# EAGLE board pk4017 (EAGLE 7.7.0)

Size 56.18 x 74.92 mm. Coordinates in mm from the lower left corner, seen from the top.
Outline: 0,0 56.18,0 56.18,74.92 0,74.92 0,0
Copper layers (1*16): Top 0.035mm / dielectric 1.5mm / Bottom 0.035mm
Design rules "default": minimum track width 10mil, minimum drill 24mil, track to track 8mil, track to pad 8mil, pad to pad 8mil, via to via 8mil, smd to smd 8mil, copper to edge 40mil, drill to drill 8mil, minimum pad ring 10mil, minimum via ring 8mil, stop-mask expansion 4mil, vias tented up to drill 0mil, thermal gap 10mil

## Footprints (pad centres in the part's own frame; a part is rotated, then mirrored left to right if it is on the bottom)
C0805 = smd 1.3 x 1.5: 1 -0.95,0; 2 0.95,0
C050-025X075 = drill 0.813 octagon: 1 -2.54,0; 2 2.54,0
LED3MM = drill 0.813 octagon: A -1.27,0; K 1.27,0
D-2.5 = drill 0.813 octagon: A 1.27,0; C -1.27,0
SO16 = smd 0.66 x 2.032: 1 -4.445,-3.073; 2 -3.175,-3.073; 3 -1.905,-3.073; 4 -0.635,-3.073; 5 0.635,-3.073; 6 1.905,-3.073; 7 3.175,-3.073; 8 4.445,-3.073; 9 4.445,3.073; 10 3.175,3.073; 11 1.905,3.073; 12 0.635,3.073; 13 -0.635,3.073; 14 -1.905,3.073; 15 -3.175,3.073; 16 -4.445,3.073
TO92 = drill 0.813 octagon: 1 -1.27,0; 2 0,1.905; 3 1.27,0
SO08 = smd 0.6 x 2.2: 1 -1.905,-2.6; 2 -0.635,-2.6; 3 0.635,-2.6; 4 1.905,-2.6; 5 1.905,2.6; 6 0.635,2.6; 7 -0.635,2.6; 8 -1.905,2.6
ERTHENVAR-JACK = drill 2.5: 1@1 -4.2,0; 2 0,-3.3; 3 0,4.9 | drill 1.5: 1@2 4.2,0
R0805 = smd 1.3 x 1.5: 1 -0.95,0; 2 0.95,0
POWER_10 = drill 1.016 pad 1.88 octagon: 1 -5.08,-1.27; 2 -5.08,1.27; 3 -2.54,-1.27; 4 -2.54,1.27; 5 0,-1.27; 6 0,1.27; 7 2.54,-1.27; 8 2.54,1.27; 9 5.08,-1.27; 10 5.08,1.27
9MM_SNAP-IN_POT = drill 1.1 square: 1 -2.5,-7 | drill 1.1 octagon: 2 0,-7; 3 2.5,-7 | drill 2.1 pad 2.794: CHASSIS1 -4.5,0; CHASSIS2 4.5,0

## Placement (x,y rotation side)
C1  0.33u  [C0805]  34.29,58.42 0 top
C2  0.1u  [C0805]  40,64.77 180 top
C3  4.7u  [C0805]  40,68.58 180 top
C4  0.1u  [C050-025X075]  35.56,16.51 0 top
C5  4.7u  [C0805]  34.29,54.61 180 top
C6  4.7u  [C0805]  40.64,72.39 0 top
C7  0.1u  [C0805]  34.29,49.53 0 top
C8  0.1u  [C0805]  40.64,49.53 180 top
CLOCK  CLOCK  [LED3MM]  45.72,69.85 0 top
D1  "5v1"  [D-2.5]  48.26,34.29 270 top
D2  5v1  [D-2.5]  44.45,34.29 270 top
IC1  4017D  [SO16]  35.56,26.67 270 top
IC2  78L05Z  [TO92]  40.64,59.69 180 top
IC3  TL072D  [SO08]  35.56,39.37 270 top
IN  IN  [ERTHENVAR-JACK]  49.53,24.13 0 top
OUT  OUT  [ERTHENVAR-JACK]  49.53,8.89 0 top
R1  1k  [R0805]  7.62,67.31 90 bottom
R2  1k  [R0805]  7.62,54.61 180 bottom
R3  1k  [R0805]  7.62,38.73 180 bottom
R4  1k  [R0805]  7.62,24.13 180 bottom
R5  1k  [R0805]  8.89,6.35 270 bottom
R6  1k  [R0805]  21.59,69.22 0 bottom
R7  1k  [R0805]  21.59,53.97 0 bottom
R8  1k  [R0805]  21.59,40 0 bottom
R9  1k  [R0805]  21.59,23.5 180 bottom
R10  1k  [R0805]  21.59,8.89 0 bottom
R11  220  [R0805]  45.72,41.91 0 top
R12  100k  [R0805]  45.72,46.99 0 bottom
R13  100k  [R0805]  52.07,46.99 180 bottom
R14  220  [R0805]  52.07,41.91 0 top
R15  1k  [R0805]  45.72,64.77 0 bottom
R16  1k  [R0805]  52.07,64.77 0 bottom
RESET  RESET  [ERTHENVAR-JACK]  49.53,54.61 0 top
RST  RESET  [LED3MM]  52.07,69.85 0 top
U$1  POWER_SIMPLE10  [POWER_10]  34.29,67.31 270 top
VR1  10k  [9MM_SNAP-IN_POT]  7.62,69.85 0 top
VR2  10k  [9MM_SNAP-IN_POT]  7.62,54.61 0 top
VR3  10k  [9MM_SNAP-IN_POT]  7.62,39.37 0 top
VR4  10k  [9MM_SNAP-IN_POT]  7.62,24.13 0 top
VR5  10k  [9MM_SNAP-IN_POT]  7.62,8.89 0 top
VR6  10k  [9MM_SNAP-IN_POT]  21.59,69.85 0 top
VR7  10k  [9MM_SNAP-IN_POT]  21.59,54.61 0 top
VR8  10k  [9MM_SNAP-IN_POT]  21.59,39.37 0 top
VR9  10k  [9MM_SNAP-IN_POT]  21.59,24.13 0 top
VR10  10k  [9MM_SNAP-IN_POT]  21.59,8.89 0 top
VR11  50k  [9MM_SNAP-IN_POT]  35.56,8.89 0 top

## Library data of the parts
C1-C8 R1-R16 = rcl
CLOCK RST = led
D1 D2 = diode
IC1 = 40xx
IC2 IC3 = linear
IN OUT RESET = erthenvar
U$1 = eurorack
VR1-VR11 = MusicThingModular

## Nets
+5V: C2.1 C3.1 IC1.16 IC2.1
+12V: C1.1 C5.1 C8.2 IC2.3 IC3.8 U$1.9 U$1.10
-12V: C6.1 C7.1 IC3.4 U$1.1 U$1.2
BUF_CLK: IC1.14 IC3.1 IC3.2
BUF_RST: IC1.15 IC3.6 IC3.7
CLK: D1.C IC3.3 R11.2 R15.1
CV1: IC1.3 VR1.3
CV2: IC1.2 VR2.3
CV3: IC1.4 VR3.3
CV4: IC1.7 VR4.3
CV5: IC1.10 VR5.3
CV6: IC1.1 VR6.3
CV7: IC1.5 VR7.3
CV8: IC1.6 VR8.3
CV9: IC1.9 VR9.3
CV10: IC1.11 VR10.3
GND: C1.2 C2.2 C3.2 C4.2 C5.2 C6.2 C7.2 C8.1 CLOCK.K D1.A D2.A IC1.8 IC1.13 IC2.2 IN.1@1 IN.1@2 IN.2 OUT.1@1 OUT.1@2 OUT.2 R12.1 R13.1 RESET.1@1 RESET.1@2 RESET.2 RST.K U$1.3 U$1.4 U$1.5 U$1.6 U$1.7 U$1.8 VR1.1 VR2.1 VR3.1 VR4.1 VR5.1 VR6.1 VR7.1 VR8.1 VR9.1 VR10.1
N$1: IN.3 R11.1 R12.2
N$2: CLOCK.A R15.2
N$4: R13.2 R14.2 RESET.3
N$5: R16.2 RST.A
N$6: C4.1 OUT.3 VR11.1
N$31: R1.2 R2.2 R3.2 R4.2 R5.2 R6.2 R7.2 R8.2 R9.2 R10.2 VR11.2 VR11.3
OUT1: R1.1 VR1.2
OUT2: R2.1 VR2.2
OUT3: R3.1 VR3.2
OUT4: R4.1 VR4.2
OUT5: R5.1 VR5.2
OUT6: R6.1 VR6.2
OUT7: R7.1 VR7.2
OUT8: R8.1 VR8.2
OUT9: R9.1 VR9.2
OUT10: R10.1 VR10.2
RST: D2.C IC3.5 R14.1 R16.1

## Tracks (layer width: path | path; a pad name or v marks a point on that pad's centre or on a via)
+5V  (3 unrouted)
+12V  (6 unrouted)
-12V  (4 unrouted)
BUF_CLK  (2 unrouted)
BUF_RST  (2 unrouted)
CLK  (3 unrouted)
CV1  (1 unrouted)
CV2  (1 unrouted)
CV3  (1 unrouted)
CV4  (1 unrouted)
CV5  (1 unrouted)
CV6  (1 unrouted)
CV7  (1 unrouted)
CV8  (1 unrouted)
CV9  (1 unrouted)
CV10  (1 unrouted)
GND  (41 unrouted)
N$1  (2 unrouted)
N$2  (1 unrouted)
N$4  (2 unrouted)
N$5  (1 unrouted)
N$6  (2 unrouted)
N$31  (11 unrouted)
OUT1  (1 unrouted)
OUT2  (1 unrouted)
OUT3  (1 unrouted)
OUT4  (1 unrouted)
OUT5  (1 unrouted)
OUT6  (1 unrouted)
OUT7  (1 unrouted)
OUT8  (1 unrouted)
OUT9  (1 unrouted)
OUT10  (1 unrouted)
RST  (3 unrouted)